# Altium PCB MilliNut.PcbDoc
Units mm, origin at the board's own origin, x right, y up, seen from the top; angles counter-clockwise.
Board outline 32 x 50 mm, 2 copper layers (Top Layer, Bottom Layer); 14 components, 36 nets, 104 pads, 0 vias.
Unrouted connection lines stored in the file: 50.
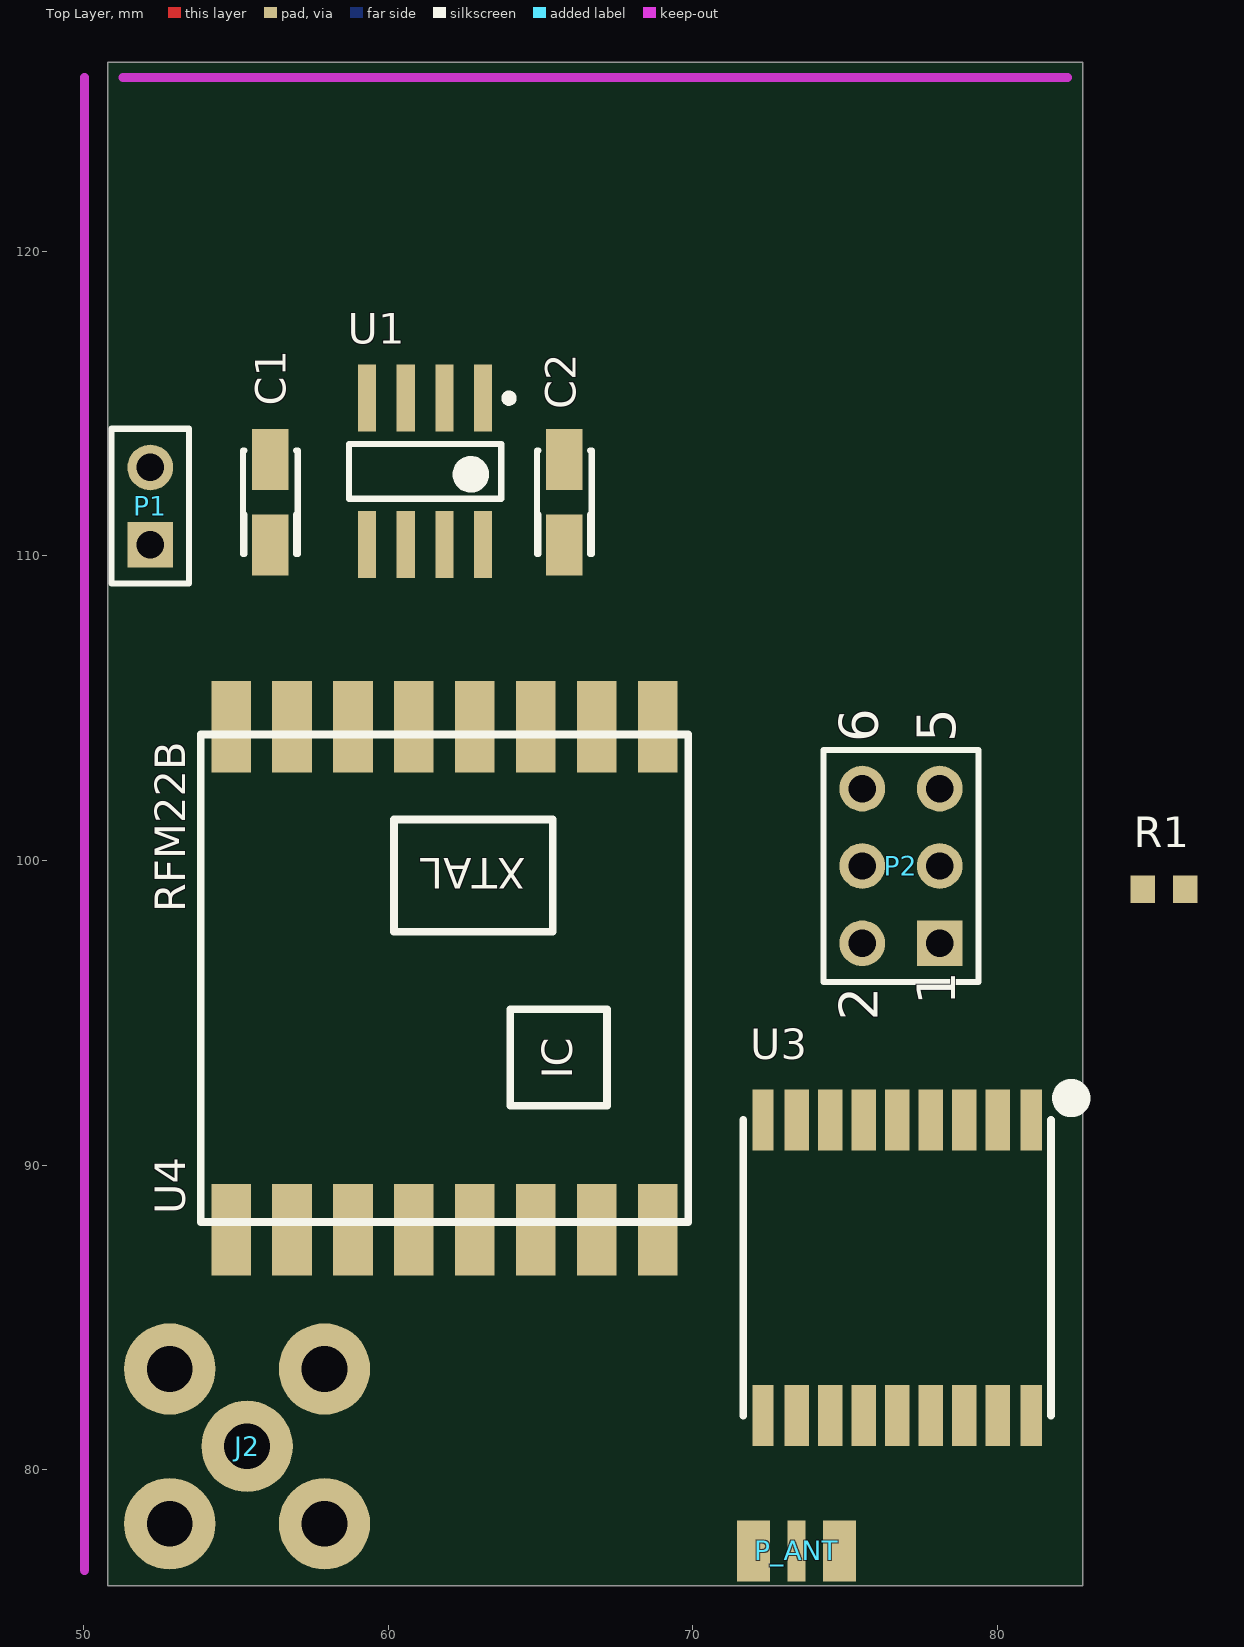
[diagram p0: Top Layer view]
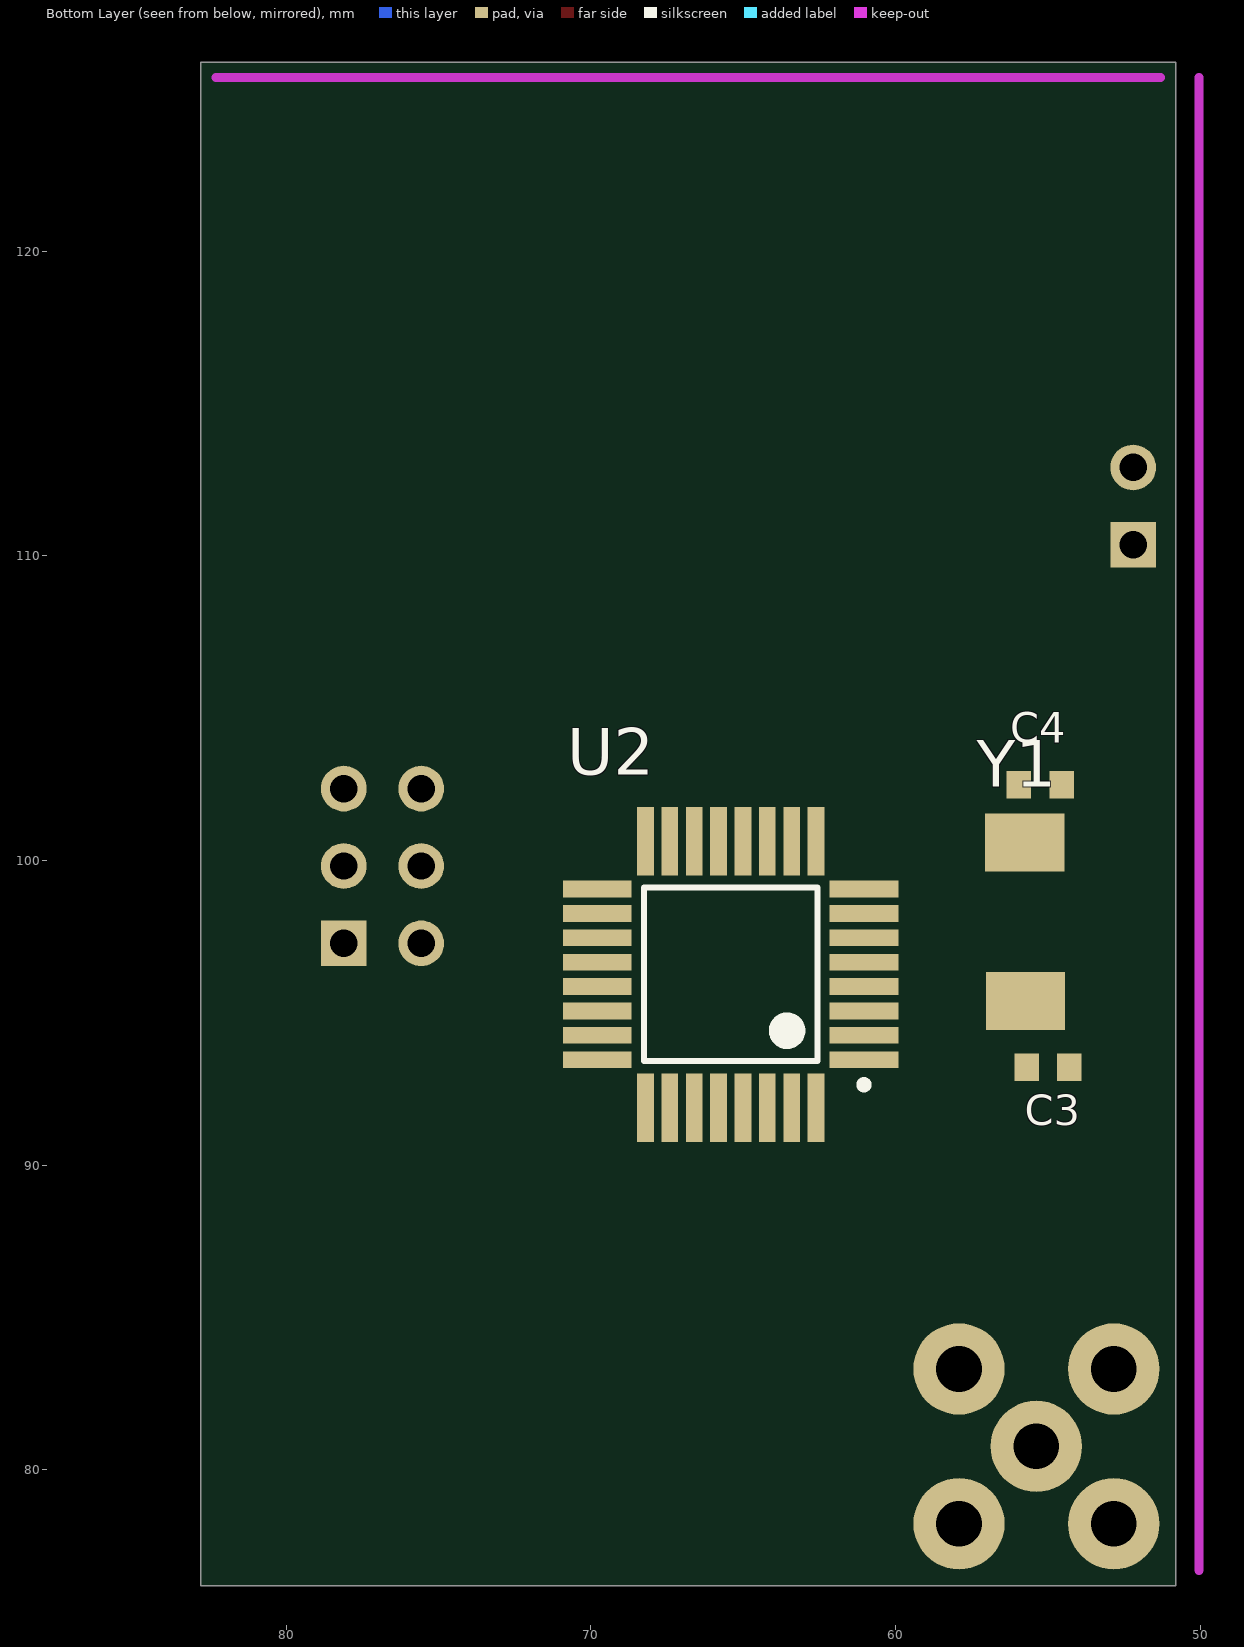
[diagram p1: Bottom Layer view, seen from below]

## Layer stack, top to bottom
Top Layer: signal copper 0.0356
Dielectric: dielectric 0.32, FR-4, Dk 4.8
Bottom Layer: signal copper 0.0356

## Board outline
50.8,76.2 82.8,76.2 82.8,126.2 50.8,126.2

## Design rules (kind name [scope] priority, off if disabled: settings)
Clearance [All] p1: gap=0.2
ComponentClearance [All] p1 off: gap=0.254 collisioncheckmode=3 verticalgap=0.254 showdistances=FALSE
PolygonConnect [All] p1: connectstyle=Relief reliefconductorwidth=0.254 reliefentries=4 polygonreliefangle="90 Angle"
RoutingVias [All] p1: holewidth=0.6 width=0.8 viastyle="Through Hole" minholewidth=0.711 minwidth=1.27 maxholewidth=0.711 maxwidth=1.27
SilkscreenOverComponentPads [All] p1: minsilkscreentomaskgap=0.254
SolderMaskExpansion [All] p1: expansion=0.102
Width [All] p1: maxlimit=3 minlimit=0.2 preferedwidth=0.3
26 further rules are at their usual default settings.

## Classes and differential pairs
component class MilliNut: C1 C2 C3 C4 J2 P1 P2 P_ANT R1 U2 U3 U4 Y1

## Components (designator, comment, footprint, x,y, rotation, side; value= is the part's Value field where it differs from the comment)
C1 "T491A" A 56.134,111.76 r90 top
C2 "T491A" A 65.786,111.76 r90 top
C3 "C0805" 1608[0603] 54.991,93.218 r0 bottom
C4 "C0805" 1608[0603] 55.245,102.489 r0 bottom
J2 "SMA_L" "CON SMA PCB 90" 55.372,80.772 r180 top
P1 "Power" HDR1X2 52.197,110.363 r90 top
P2 "ISP" HDR2X3 78.105,97.282 r90 top
P_ANT "Sarantel GeoHelix Antenna" "Sarantel SL1202RH" 73.406,77.343 r180 top
R1 "Res3" 1608[0603] 85.471,99.06 r0 top
U1 "TPS76633" TPS76633 61.214,112.776 r270 top
U2 "ATMega328P" TQFP32 65.405,96.266 r0 bottom
U3 "uBlox MAX-6Q" MAX-6Q 76.708,81.788 r90 top
U4 "RFM22B" RFM22B 53.848,88.138 r90 top
Y1 "8MHz" ABM3_XTAL 55.626,99.695 r270 bottom

## Footprints (in the part's own frame and the unit in brackets; to place one, negate y for a bottom-side part, rotate by r counter-clockwise, add the part's x,y. Pads: shape width x height; smd on the part's side, far side on the other; paste and mask are expansions set on the pad)
1608[0603] [mm] "Chip Capacitor, Body 1.6x0.8mm, IPC High Density"
  rect 0.8x0.9 smd: 1(-0.7,0) 2(0.7,0)
  body extent -0.87,-0.48 0.87,0.48, height 1.3
A [mm] "Capacitor, SM Tantalum; Body 3.2 x 1.6 mm (LxW typ)"
  rect 2x1.2 smd: 1(-1.4,0) 2(1.4,0)
  silkscreen extent -1.7,-0.9 1.7,0.9
ABM3_XTAL [mm]
  rect 1.9x2.6 smd: 1(-0.9,-0.125) 2(4.3,-0.1)
  body extent -1.4,-1.95 4.8,1.75, height 1.34
"CON SMA PCB 90" [mm] "UofA Lib Pavel"
  round 3 hole 1.5: 1(0,0) 2(-2.54,2.54) 2(-2.54,-2.54) 2(2.54,2.54) 2(2.54,-2.54)
HDR1X2 [mm] "Connector; Header; 2 Position"
  rect 1.5x1.5 hole 0.9: 1(0,0)
  round 1.5 hole 0.9: 2(2.54,0)
  silkscreen extent -1.27,-1.27 3.81,1.27
HDR2X3 [mm] "Connector; Header; 3x2 Position"
  rect 1.5x1.5 hole 0.9: 1(0,0)
  round 1.5 hole 0.9: 2(0,2.54) 3(2.54,0) 4(2.54,2.54) 5(5.08,0) 6(5.08,2.54)
  silkscreen extent -1.27,-1.27 6.35,3.81
MAX-6Q [mm]
  rect 2x0.7 smd: 1(9.7,-4.4) 9(9.7,4.4) 10(0,4.4) 18(0,-4.4)
  rect 2x0.8 smd: 2(9.7,-3.3) 3(9.7,-2.2) 4(9.7,-1.1) 5(9.7,0) 6(9.7,1.1) 7(9.7,2.2) 8(9.7,3.3) 11(0,3.3) 12(0,2.2) 13(0,1.1) 14(0,0) 15(0,-1.1) 16(0,-2.2) 17(0,-3.3)
  silkscreen extent 0,-5.84 10.54,5.05
RFM22B [mm]
  rect 3x1.3 smd: 1(-0.254,-1) 2(-0.254,-3) 3(-0.254,-5) 4(-0.254,-7) 5(-0.254,-9) 6(-0.254,-11) 7(-0.254,-13) 8(-0.254,-15) 9(16.256,-15) 10(16.256,-13) 11(16.256,-11) 12(16.256,-9) 13(16.256,-7) 14(16.256,-5) 15(16.256,-3) 16(16.256,-1)
  silkscreen extent 0,-16 16,0
"Sarantel SL1202RH" [mm]
  rect 0.6x2 smd: 1(0,0) 2(-1.651,0) 2(-1.17,0) 3(1.17,0) 3(1.651,0)
  Mechanical 1 keep-out lines w0.254: -1.988,1.143 cw(c-3.788,1.143) -5.588,1.143
  body extent -6.61,-6.65 6.66,22.85, height 6.82
TPS76633 [mm] "SOIC, 8-Leads, Body 5.0x4.0mm (max), Pitch 1.27mm, IPC Medium Density"
  rect 2.2x0.6 smd: 1(-2.4,1.905) 2(-2.4,0.635) 3(-2.4,-0.635) 4(-2.4,-1.905) 5(2.4,-1.905) 6(2.4,-0.635) 7(2.4,0.635) 8(2.4,1.905)
  silkscreen extent -2.52,-2.5 0.9,2.88, body extent -2,-2.5 2,2.5, height 1.75
TQFP32 [mm] "TQFP, 32-Leads, Body 7.3x9.3mm (max), Pitch 0.80mm, IPC Medium Density"
  rect 2.25x0.55 smd: 1(-4.375,2.8) 2(-4.375,2) 3(-4.375,1.2) 4(-4.375,0.4) 5(-4.375,-0.4) 6(-4.375,-1.2) 7(-4.375,-2) 8(-4.375,-2.8) 17(4.375,-2.8) 18(4.375,-2) 19(4.375,-1.2) 20(4.375,-0.4) 21(4.375,0.4) 22(4.375,1.2) 23(4.375,2) 24(4.375,2.8)
  rect 0.55x2.25 smd: 9(-2.8,-4.375) 10(-2,-4.375) 11(-1.2,-4.375) 12(-0.4,-4.375) 13(0.4,-4.375) 14(1.2,-4.375) 15(2,-4.375) 16(2.8,-4.375) 25(2.8,4.375) 26(2,4.375) 27(1.2,4.375) 28(0.4,4.375) 29(-0.4,4.375) 30(-1.2,4.375) 31(-2,4.375) 32(-2.8,4.375)
  silkscreen extent -4.5,-2.85 2.85,3.75, body extent -3.5,-3.5 3.5,3.5, height 1.2

## Part data
C1 C2: "Solid Tantalum Chip Capacitor, Standard T491 Series - Industrial Grade"
C3 C4: "Ceramic Chip Capacitor - Standard"
J2: "Power Connector"
P1: library part "Header 2", "Header, 2-Pin"
P2: library part "Header 3X2", "Header, 3-Pin, Dual row"
R1: "Resistor"
U4: library part RFM22B-S2
Y1: library part ECS-110-S-1, "Crystal Oscillator"

## Nets (pads, with @x,y where several pads share a name; then routed paths per layer and width w, separated by ;. In a path a pad name is that pad's centre, name@x,y a point inside that pad or via, vN(x,y) a via of type N, cw(c..) or ccw(c..) an arc to the next point about the centre after c; other vN are vias at no path point)
ADC6: U2.19
ADC7: U2.22
GND: C1.2 C2.2 C3.1 C4.1 J2.2 P1.2 P2.6 P_ANT.2 P_ANT.3 U1.3 U1.4 U2.3 U2.5 U2.21 U3.1 U3.10 U3.12 U4.2 U4.9 U4.15 U4.16
MISO: U2.16 U4.10
MOSI: U2.15 U4.11
NetJ2_1: J2.1 U4.1
NetP_ANT_1: P_ANT.1 U3.11
NetU4_3: U4.3 U4.7
NetU4_4: U4.4 U4.6
PB0: U2.12
PB1: U2.13
PB2: U2.14
PB3/MOSI: P2.4
PB4/MISO: P2.1
PB5/SCK: P2.3
PC0: U2.23
PC1: U2.24
PC2: U2.25
PC3: U2.26
PC4: U2.27
PC5: U2.28
PD0: U2.30
PD1: U2.31
PD2: U2.32
PD3: U2.1
PD4: U2.2
PD5: U2.9
PD6: U2.10
PD7: U2.11
RST: P2.5 R1.1 U2.29
SCK: U2.17 U4.12
V_REF: U2.20
VBATT: C1.1 P1.1 U1.5 U1.6
VCC: C2.1 P2.2 R1.2 U1.7 U1.8 U2.4 U2.6 U2.18 U3.6 U3.7 U3.8 U4.5
XTAL1: C3.2 U2.7 Y1.2
XTAL2: C4.2 U2.8 Y1.1
pads on no net: U1.1 U1.2 U3.2 U3.3 U3.4 U3.5 U3.9 U3.13 U3.14 U3.15 U3.16 U3.17 U3.18 U4.8 U4.13 U4.14

## Keep-outs
Keep-Out Layer:
  lines w0.3: 50.03,125.7 50.038,76.708 ; 51.3,125.7 82.3,125.7

## Silkscreen, mask and mechanical layers (free items; w line width, h text height)
Drill Drawing:
  text ".LEGEND" at 87.88,81.28 h1.52
  text "Drill Drawing." at 87.88,78.74 h1.52

## Dimensions
50.8,76.2 to 82.804,75.946 on Mechanical 1
50.03,125.7 to 50.038,76.708 on Mechanical 1

## Text inside footprints (layer, text, board x,y; h text height)
P2: Top Overlay "6" at 76.073,103.886 h1.27 r90; Top Overlay "5" at 78.613,103.886 h1.27 r90; Top Overlay "2" at 76.073,94.742 h1.27 r90; Top Overlay "1" at 78.613,95.25 h1.27 r90
U4: Top Overlay "IC" at 66.04,92.837 h1 r90; Top Overlay "XTAL" at 64.516,100.076 h1 r180